# Altium PCB Sampler_DIOT.PCBDOC (part 5 of 10)
Units mm, origin at the board's own origin, x right, y up, seen from the top; angles counter-clockwise.
Board outline 222.9 x 100 mm, 4 copper layers (L1, P2, L3, L4), stack 1.6 mm thick; 697 components, 418 nets, 2175 pads, 1124 vias.
Unrouted connection lines stored in the file: 6.
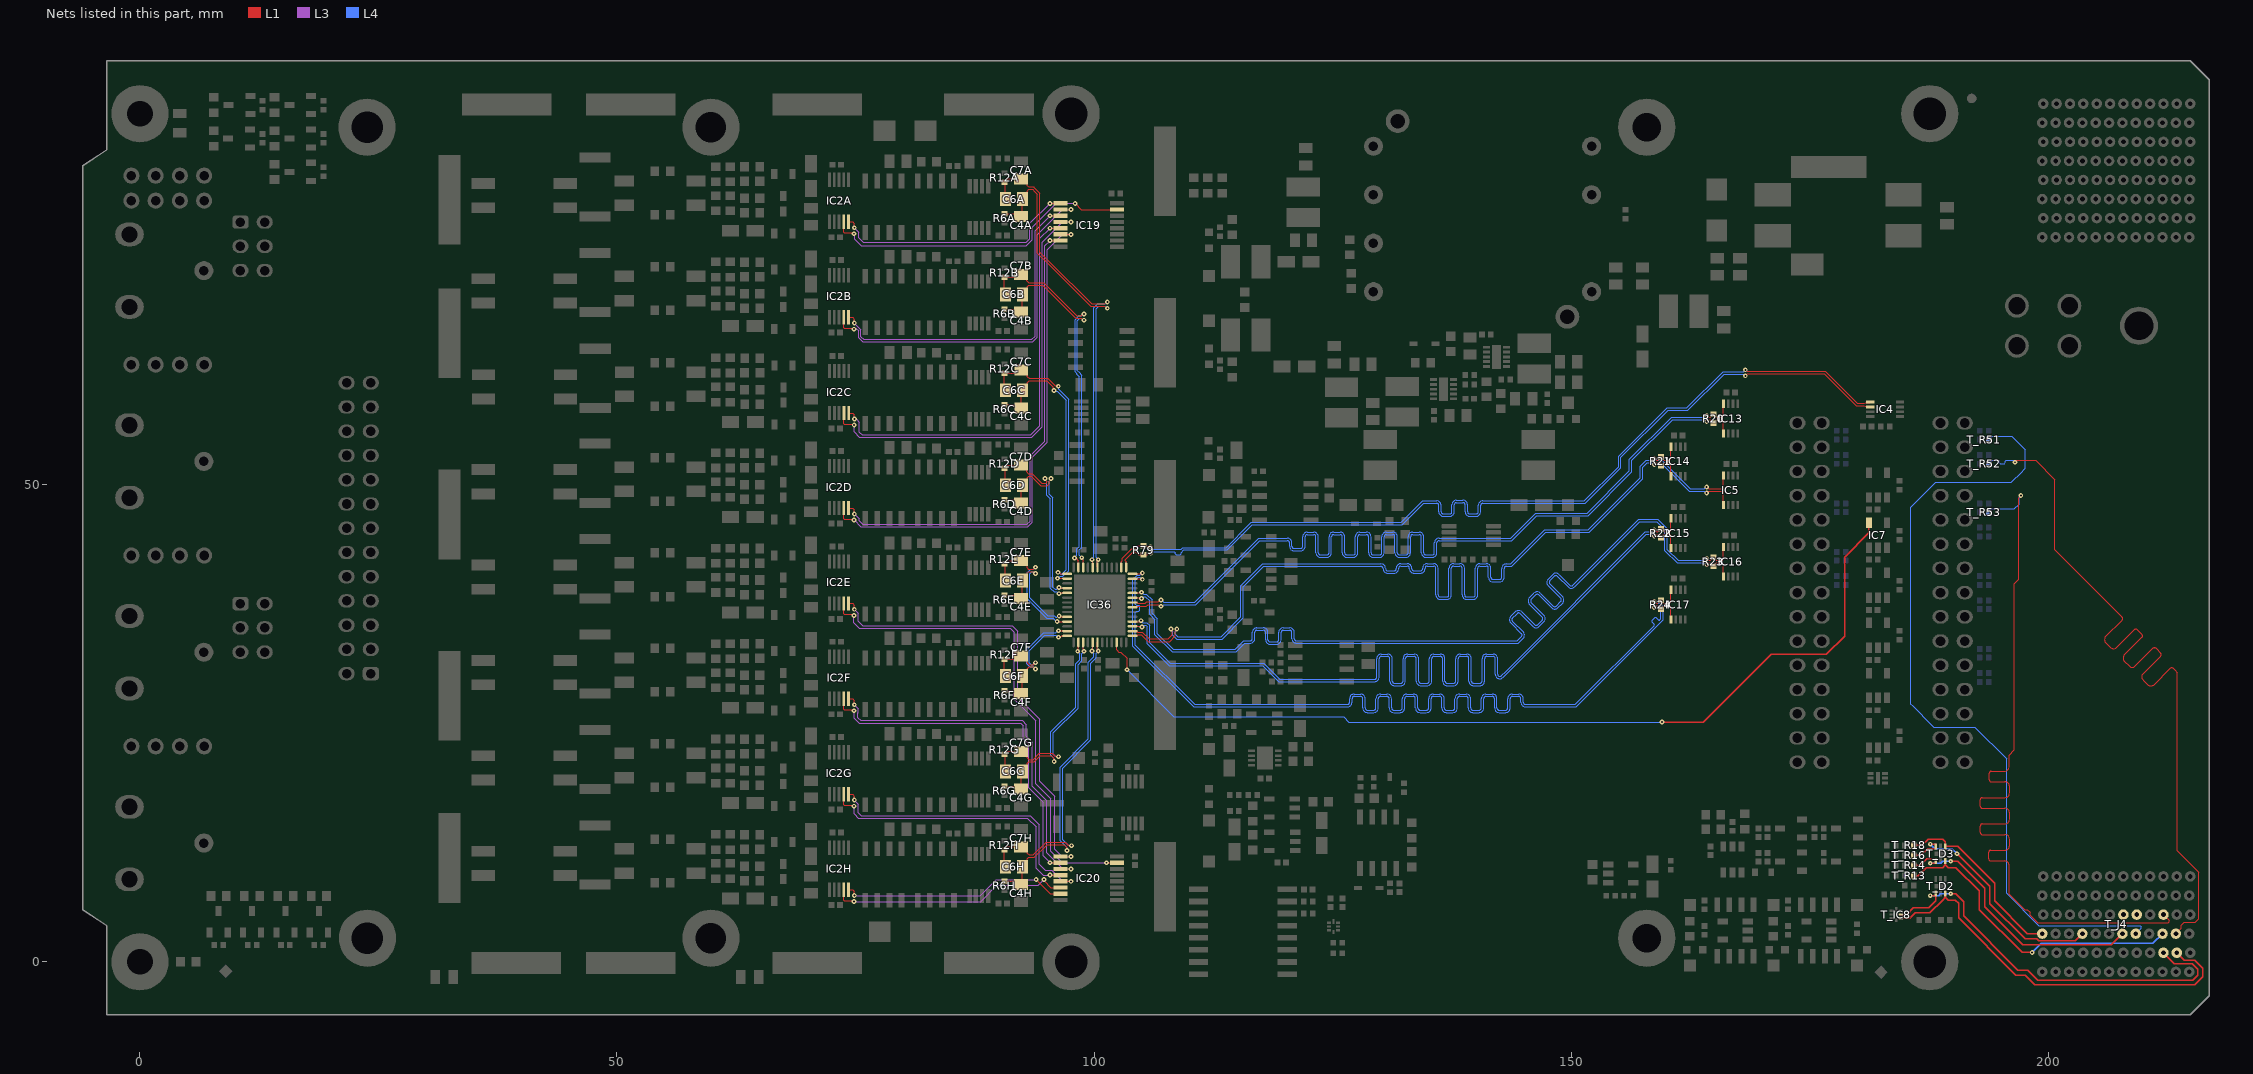
[diagram p5: the nets of this part, all layers, seen from the top]

## Via types
v1: diameter 0.5, hole 0.2, L1 to L4, tented both sides, 1103 vias
v2: diameter 1, hole 0.6, L1 to L4, tented both sides, 15 vias
v3: diameter 0.6, hole 0.3, L1 to L4, tented both sides, 6 vias

## Nets (pads, with @x,y where several pads share a name; then routed paths per layer and width w, separated by ;. In a path a pad name is that pad's centre, name@x,y a point inside that pad or via, vN(x,y) a via of type N, cw(c..) or ccw(c..) an arc to the next point about the centre after c; other vN are vias at no path point) (continued)
ADC_SDOC_N: (continued)
  L4 w0.127: v1(104.969,38.742) 105.031,38.742 105.23,38.542 105.498,38.542 106.113,37.928 106.113,36.512 106.643,35.982 106.643,34.412 108.303,32.753 114.793,32.753 115.695,33.654 116.182,33.654 116.373,33.654 ccw(c116.373,33.879) 116.598,33.879 116.598,34.53 cw(c117.078,34.53) 117.078,35.009 117.754,35.009 cw(c117.754,34.53) 118.233,34.53 118.233,33.765 ccw(c118.459,33.765) 118.459,33.539 119.135,33.539 ccw(c119.135,33.765) 119.36,33.765 119.36,34.53 cw(c119.84,34.53) 119.84,35.009 120.516,35.009 cw(c120.516,34.53) 120.995,34.53 120.995,33.879 ccw(c121.221,33.879) 121.221,33.654 122.025,33.654 144.37,33.654 144.67,33.955 144.805,34.089 ccw(c144.646,34.249) 144.805,34.409 143.686,35.527 cw(c144.025,35.866) 143.685,36.204 144.164,36.683 cw(c144.503,36.344) 144.842,36.683 146.182,35.343 ccw(c146.342,35.502) 146.501,35.343 146.979,35.821 ccw(c146.82,35.981) 146.979,36.14 145.639,37.48 cw(c145.978,37.819) 145.638,38.157 146.117,38.636 cw(c146.456,38.297) 146.795,38.636 148.135,37.296 ccw(c148.295,37.456) 148.454,37.296 148.932,37.774 ccw(c148.773,37.934) 148.932,38.093 147.592,39.433 cw(c147.931,39.772) 147.591,40.11 148.07,40.589 cw(c148.409,40.25) 148.748,40.589 149.867,39.47 ccw(c150.027,39.63) 150.186,39.47 150.808,40.092 157.094,46.378 159.1,46.378 160.1,45.378 160.1,43.212 161.234,42.079 163.961,42.079 164.145,42.263 v1(164.222,42.263)
ADC_SDOC_P: IC16.1 IC36.35 R23.1 | length 94.3
  L1 w0.127: IC36.35@104.039,38.165 104.64,38.165 104.649,38.174 104.884,38.174 v1(104.969,38.089) ; v1(164.222,41.636) 164.404,41.818 164.584,41.818 R23.1@164.927,41.475 ; R23.1@164.947,41.475 165.174,41.701 165.174,41.743 165.248,41.818 165.839,41.818 165.978,41.679 IC16.1@165.978,40.395
  L4 w0.127: v1(104.969,38.089) 105.031,38.089 105.23,38.288 105.393,38.288 105.859,37.823 105.859,36.407 106.389,35.877 106.389,34.307 108.197,32.499 114.899,32.499 115.8,33.4 116.182,33.4 116.373,33.4 ccw(c116.373,33.879) 116.852,33.879 116.852,34.53 cw(c117.078,34.53) 117.078,34.755 117.754,34.755 cw(c117.754,34.53) 117.979,34.53 117.979,33.765 ccw(c118.459,33.765) 118.459,33.285 119.135,33.285 ccw(c119.135,33.765) 119.614,33.765 119.614,34.53 cw(c119.84,34.53) 119.84,34.755 120.516,34.755 cw(c120.516,34.53) 120.741,34.53 120.741,33.879 ccw(c121.221,33.879) 121.221,33.4 122.025,33.4 144.475,33.4 144.85,33.775 144.985,33.91 ccw(c144.646,34.249) 145.022,34.546 145.022,34.55 144.985,34.587 ; 144.985,34.588 143.866,35.707 cw(c144.025,35.866) 143.866,36.025 144.344,36.503 cw(c144.503,36.344) 144.663,36.503 146.003,35.164 ccw(c146.342,35.502) 146.68,35.162 147.159,35.642 ccw(c146.82,35.981) 147.159,36.32 145.819,37.66 cw(c145.978,37.819) 145.819,37.978 146.297,38.456 cw(c146.456,38.297) 146.616,38.456 147.956,37.117 ccw(c148.295,37.456) 148.633,37.115 149.112,37.595 ccw(c148.773,37.934) 149.112,38.273 147.772,39.613 cw(c147.931,39.772) 147.772,39.931 148.25,40.41 cw(c148.409,40.25) 148.569,40.41 149.688,39.291 ccw(c150.027,39.63) 150.366,39.291 150.987,39.912 157.199,46.124 158.994,46.124 159.846,45.272 159.846,43.107 161.128,41.825 163.956,41.825 164.145,41.636 v1(164.222,41.636)
ADC_SDOD_N: IC17.8 IC36.40 R24.2 | length 95.6
  L1 w0.127: IC36.40@104.039,40.665 104.988,40.665 v1(105.064,40.742) ; v1(158.722,37.763) 158.913,37.572 159.084,37.572 R24.2@159.427,37.915 ; R24.2@159.447,37.915 159.673,37.688 159.673,37.646 159.748,37.572 160.343,37.572 160.477,37.706 IC17.8@160.477,38.995
  L4 w0.127: v1(105.064,40.742) 105.002,40.742 104.803,40.542 104.543,40.542 104.081,40.08 104.081,33.074 110.43,26.725 126.375,26.725 126.566,26.725 ccw(c126.566,27.204) 127.045,27.204 127.045,27.591 cw(c127.27,27.591) 127.27,27.817 127.947,27.817 cw(c127.947,27.591) 128.172,27.591 128.172,26.609 ccw(c128.651,26.609) 128.651,26.13 129.328,26.13 ccw(c129.328,26.609) 129.807,26.609 129.807,27.591 cw(c130.032,27.591) 130.032,27.817 130.709,27.817 cw(c130.709,27.591) 130.934,27.591 130.934,26.609 ccw(c131.413,26.609) 131.413,26.13 132.09,26.13 ccw(c132.09,26.609) 132.569,26.609 132.569,27.591 cw(c132.794,27.591) 132.794,27.817 133.471,27.817 cw(c133.471,27.591) 133.696,27.591 133.696,26.609 ccw(c134.175,26.609) 134.175,26.13 134.852,26.13 ccw(c134.852,26.609) 135.331,26.609 135.331,27.591 cw(c135.556,27.591) 135.556,27.817 136.233,27.817 cw(c136.233,27.591) 136.458,27.591 136.458,26.609 ccw(c136.937,26.609) 136.937,26.13 137.614,26.13 ccw(c137.614,26.609) 138.093,26.609 138.093,27.591 cw(c138.318,27.591) 138.318,27.817 138.995,27.817 cw(c138.995,27.591) 139.22,27.591 139.22,26.609 ccw(c139.699,26.609) 139.699,26.13 140.376,26.13 ccw(c140.376,26.609) 140.855,26.609 140.855,27.591 cw(c141.08,27.591) 141.08,27.817 141.757,27.817 cw(c141.757,27.591) 141.982,27.591 141.982,26.609 ccw(c142.461,26.609) 142.461,26.13 143.138,26.13 ccw(c143.138,26.609) 143.617,26.609 143.617,27.591 cw(c143.842,27.591) 143.842,27.817 144.519,27.817 cw(c144.519,27.591) 144.744,27.591 144.744,27.204 ccw(c145.223,27.204) 145.223,26.725 146.065,26.725 150.555,26.725 159.684,35.854 159.684,37.237 159.342,37.578 158.982,37.578 158.798,37.763 v1(158.722,37.763)
ADC_SDOD_P: IC17.1 IC36.39 R24.1 | length 95.4
  L1 w0.127: IC36.39@104.039,40.165 104.988,40.165 v1(105.064,40.089) ; v1(158.722,37.136) 158.904,37.318 159.084,37.318 R24.1@159.427,36.975 ; R24.1@159.447,36.975 159.673,37.201 159.673,37.243 159.748,37.318 160.339,37.318 160.477,37.179 IC17.1@160.477,35.895
  L4 w0.127: v1(105.064,40.089) 105.002,40.089 104.803,40.288 104.649,40.288 104.335,39.974 104.335,37.945 104.335,37.501 104.46,37.376 104.684,37.376 104.809,37.25 104.809,36.874 104.684,36.749 104.46,36.749 104.335,36.623 104.335,35.933 104.335,33.18 110.535,26.979 126.375,26.979 126.566,26.979 ccw(c126.566,27.204) 126.791,27.204 126.791,27.591 cw(c127.27,27.591) 127.27,28.071 127.947,28.071 cw(c127.947,27.591) 128.426,27.591 128.426,26.609 ccw(c128.651,26.609) 128.651,26.384 129.328,26.384 ccw(c129.328,26.609) 129.553,26.609 129.553,27.591 cw(c130.032,27.591) 130.032,28.071 130.709,28.071 cw(c130.709,27.591) 131.188,27.591 131.188,26.609 ccw(c131.413,26.609) 131.413,26.384 132.09,26.384 ccw(c132.09,26.609) 132.315,26.609 132.315,27.591 cw(c132.794,27.591) 132.794,28.071 133.471,28.071 cw(c133.471,27.591) 133.95,27.591 133.95,26.609 ccw(c134.175,26.609) 134.175,26.384 134.852,26.384 ccw(c134.852,26.609) 135.077,26.609 135.077,27.591 cw(c135.556,27.591) 135.556,28.071 136.233,28.071 cw(c136.233,27.591) 136.712,27.591 136.712,26.609 ccw(c136.937,26.609) 136.937,26.384 137.614,26.384 ccw(c137.614,26.609) 137.839,26.609 137.839,27.591 cw(c138.318,27.591) 138.318,28.071 138.995,28.071 cw(c138.995,27.591) 139.474,27.591 139.474,26.609 ccw(c139.699,26.609) 139.699,26.384 140.376,26.384 ccw(c140.376,26.609) 140.601,26.609 140.601,27.591 cw(c141.08,27.591) 141.08,28.071 141.757,28.071 cw(c141.757,27.591) 142.236,27.591 142.236,26.609 ccw(c142.461,26.609) 142.461,26.384 143.138,26.384 ccw(c143.138,26.609) 143.363,26.609 143.363,27.591 cw(c143.842,27.591) 143.842,28.071 144.519,28.071 cw(c144.519,27.591) 144.998,27.591 144.998,27.204 ccw(c145.223,27.204) 145.223,26.979 146.065,26.979 150.45,26.979 158.655,35.184 158.7,35.229 ccw(c158.61,35.319) 158.7,35.408 158.5,35.608 cw(c158.589,35.696) 158.5,35.785 158.766,36.051 cw(c158.855,35.962) 158.944,36.051 159.143,35.852 ccw(c159.233,35.942) 159.323,35.852 159.43,35.959 159.43,36.057 159.43,37.132 159.237,37.324 158.987,37.324 158.798,37.136 v1(158.722,37.136)
BGA0: T_D3.3 T_J4.C3 T_R13.2 | length 32.7
  L1 w0.152: T_R13.2@185.942,9.044 186.399,9.044 187.23,9.875 187.544,9.875 188.944,9.875 189.231,10.161 ; T_D3.3@189.231,10.572 189.231,10.161 ; v1(198.337,0.978) 197.296,0.978 192.791,5.482 192.791,7.434 190.35,9.875 189.864,9.875 189.517,9.875 189.231,10.161
  L4 w0.152: v1(198.337,0.978) 199.309,1.95 211,1.95 T_J4.C3@212,2.95
BGA1: T_D3.1 T_J4.F3 T_R14.2 | length 28.9
  L1 w0.152: T_R14.2@185.942,10.098 186.563,10.098 187.267,10.802 188.157,10.802 188.231,10.729 T_D3.1@188.231,10.572 ; v1(187.654,10.334) T_D3.1@188.26,10.334 ; v1(189.807,10.537) 190.538,10.537 193.341,7.733 193.341,5.782 197.356,1.767 206.617,1.767 T_J4.F3@207.8,2.95
  L4 w0.152: v1(187.654,10.334) 188.759,10.334 188.962,10.537 v1(189.807,10.537)
BGA2: T_D3.6 T_J4.I3 T_R16.2 | length 24.6
  L1 w0.152: T_R16.2@185.942,11.153 186.665,11.153 187.374,11.862 T_D3.6@188.157,11.862 ; v1(187.654,12.331) T_D3.6@188.26,12.331 ; v1(190.47,11.332) 193.899,7.903 193.899,6.11 197.616,2.394 198.809,2.394 199.011,2.192 202.842,2.192 T_J4.I3@203.6,2.95
  L4 w0.152: v1(187.654,12.331) 188.109,11.876 189.926,11.876 v1(190.47,11.332)
BGA3: T_D3.4 T_J4.L3 T_R18.2 | length 19.2
  L1 w0.152: T_R18.2@185.942,12.207 186.79,12.207 187.435,12.853 188.966,12.853 189.231,12.588 T_D3.4@189.231,12.092 190.528,12.092 194.398,8.222 194.398,6.398 197.846,2.95 T_J4.L3@199.4,2.95
BP_CLK.CLK_N: T_J4.F4
BP_CLK.CLK_P: T_J4.E4
BP_I2C.SCL: T_D2.3 T_IC8.6 T_J4.B2 | length 42.3
  L1 w0.152: T_IC8.6@184.566,4.558 185.514,4.558 186.105,5.15 187.618,5.15 188.944,6.476 189.231,6.763 ; T_D2.3@189.231,7.173 189.231,6.763 ; T_J4.B2@213.5,0.95 214.282,0.168 215.378,0.168 216.203,-0.657 216.203,-1.589 215.391,-2.401 198.631,-2.401 197.616,-1.386 196.633,-1.386 190.652,4.596 190.652,6.123 190.299,6.476 189.517,6.476 189.231,6.763
BP_I2C.SDA: T_D2.1 T_IC8.7 T_J4.C2 | length 43.8
  L1 w0.152: T_IC8.7@184.566,4.958 185.207,4.958 185.898,5.65 187.5,5.65 188.231,6.381 T_D2.1@188.231,6.935 ; v1(187.654,6.935) T_D2.1@188.231,6.935 ; T_D2.1@188.157,7.404 188.231,7.33 T_D2.1@188.231,7.173 T_D2.1@188.231,6.935 ; T_D2.1@188.26,6.935 T_D2.1@188.231,6.935 ; v1(189.807,7.138) 190.333,7.138 191.157,6.314 191.157,4.805 196.843,-0.881 197.849,-0.881 198.92,-1.953 215.152,-1.953 215.697,-1.407 215.697,-0.803 215.093,-0.199 213.249,-0.199 T_J4.C2@212.1,0.95
  L4 w0.152: v1(187.654,6.935) 188.523,6.935 188.726,7.138 v1(189.807,7.138)
BP_IO.LVDS_N0: T_J4.E3 T_R51.1 | length 83.9
  L4 w0.127: T_R51.1@193.796,54.749 193.796,54.769 194.117,55.09 196.172,55.09 197.603,53.659 197.603,51.715 197.12,51.232 196.289,50.401 196.137,50.25 188.208,50.25 188.06,50.101 185.761,47.803 185.613,47.654 185.613,27.023 185.761,26.875 187.887,24.749 188.036,24.6 192.333,24.6 195.666,21.267 195.666,11.989 195.666,7.165 195.815,7.016 198.879,3.952 199.028,3.803 209.681,3.803 209.793,3.691 209.793,3.543 T_J4.E3@209.2,2.95
BP_IO.LVDS_N1: T_J4.B3 T_R52.1 | length 81.6
  L1 w0.127: v1(196.551,52.364) 196.551,52.374 196.728,52.55 198.7,52.55 200.724,50.526 200.724,43.167 206.856,37.035 206.953,36.938 207.754,36.137 cw(c207.595,35.977) 207.755,35.817 206.059,34.121 ; 206.058,34.121 ccw(c206.397,33.781) 206.058,33.442 206.536,32.964 ccw(c206.875,33.303) 207.214,32.964 209.048,34.798 cw(c209.207,34.638) 209.366,34.797 ; 208.011,32.168 ccw(c208.35,31.828) 208.011,31.489 208.489,31.011 ccw(c208.828,31.35) 209.167,31.011 211.001,32.845 cw(c211.16,32.685) 211.32,32.844 ; 208.012,32.168 209.844,34.001 ccw(c209.685,34.16) 209.844,34.32 209.367,34.797 ; 209.964,30.215 ccw(c210.303,29.875) 209.964,29.536 210.442,29.058 ccw(c210.781,29.397) 211.12,29.058 212.817,30.755 cw(c212.976,30.596) 213.136,30.755 213.173,30.718 213.27,30.62 213.571,30.32 213.571,11.645 215.811,9.405 215.811,4.492 215.446,4.127 214.296,4.127 213.984,3.814 213.984,3.534 T_J4.B3@213.4,2.95 ; 209.965,30.215 211.797,32.048 ccw(c211.638,32.207) 211.797,32.367 211.32,32.844
  L4 w0.127: T_R52.1@193.796,52.209 193.796,52.229 194.117,52.55 194.122,52.55 194.813,52.55 194.907,52.456 194.907,52.296 195.001,52.202 195.44,52.202 195.534,52.296 195.534,52.456 195.628,52.55 196.03,52.55 196.375,52.55 196.551,52.374 v1(196.551,52.364)
BP_IO.LVDS_N2: T_J4.C4 T_R53.1 | length 84.4
  L1 w0.127: v1(197.151,48.882) 197.151,48.807 196.953,48.609 196.953,40.119 196.476,39.642 196.476,22.222 195.927,21.673 195.927,21.113 195.927,20.464 cw(c195.448,20.464) 195.448,19.984 194.07,19.984 ccw(c194.07,19.759) 193.844,19.759 193.844,19.083 ccw(c194.07,19.083) 194.07,18.857 195.484,18.857 cw(c195.484,18.378) 195.964,18.378 195.964,17.702 cw(c195.484,17.702) 195.484,17.222 193.124,17.222 ccw(c193.124,16.997) 192.899,16.997 192.899,16.321 ccw(c193.124,16.321) 193.124,16.095 195.484,16.095 cw(c195.484,15.616) 195.964,15.616 195.964,14.94 cw(c195.484,14.94) 195.484,14.46 193.124,14.46 ccw(c193.124,14.235) 192.899,14.235 192.899,13.559 ccw(c193.124,13.559) 193.124,13.333 195.484,13.333 cw(c195.484,12.854) 195.964,12.854 195.964,12.178 cw(c195.484,12.178) 195.484,11.698 194.003,11.698 ccw(c194.003,11.473) 193.777,11.473 193.777,10.797 ccw(c194.003,10.797) 194.003,10.571 195.448,10.571 cw(c195.448,10.092) 195.927,10.092 195.927,9.901 195.927,7.083 197.244,5.766 197.289,5.721 197.54,5.469 197.673,5.469 197.684,5.481 197.818,5.481 198.128,5.17 198.128,5.037 198.117,5.026 198.117,4.893 198.56,4.45 198.605,4.405 198.913,4.097 212.581,4.097 212.693,4.209 212.693,4.357 T_J4.C4@212.1,4.95
  L4 w0.127: T_R53.1@193.796,47.129 193.796,47.149 194.117,47.47 196.449,47.47 196.965,47.986 196.965,48.705 197.141,48.882 v1(197.151,48.882)